# EAGLE board TopSolarPanel (EAGLE 6.6.0)
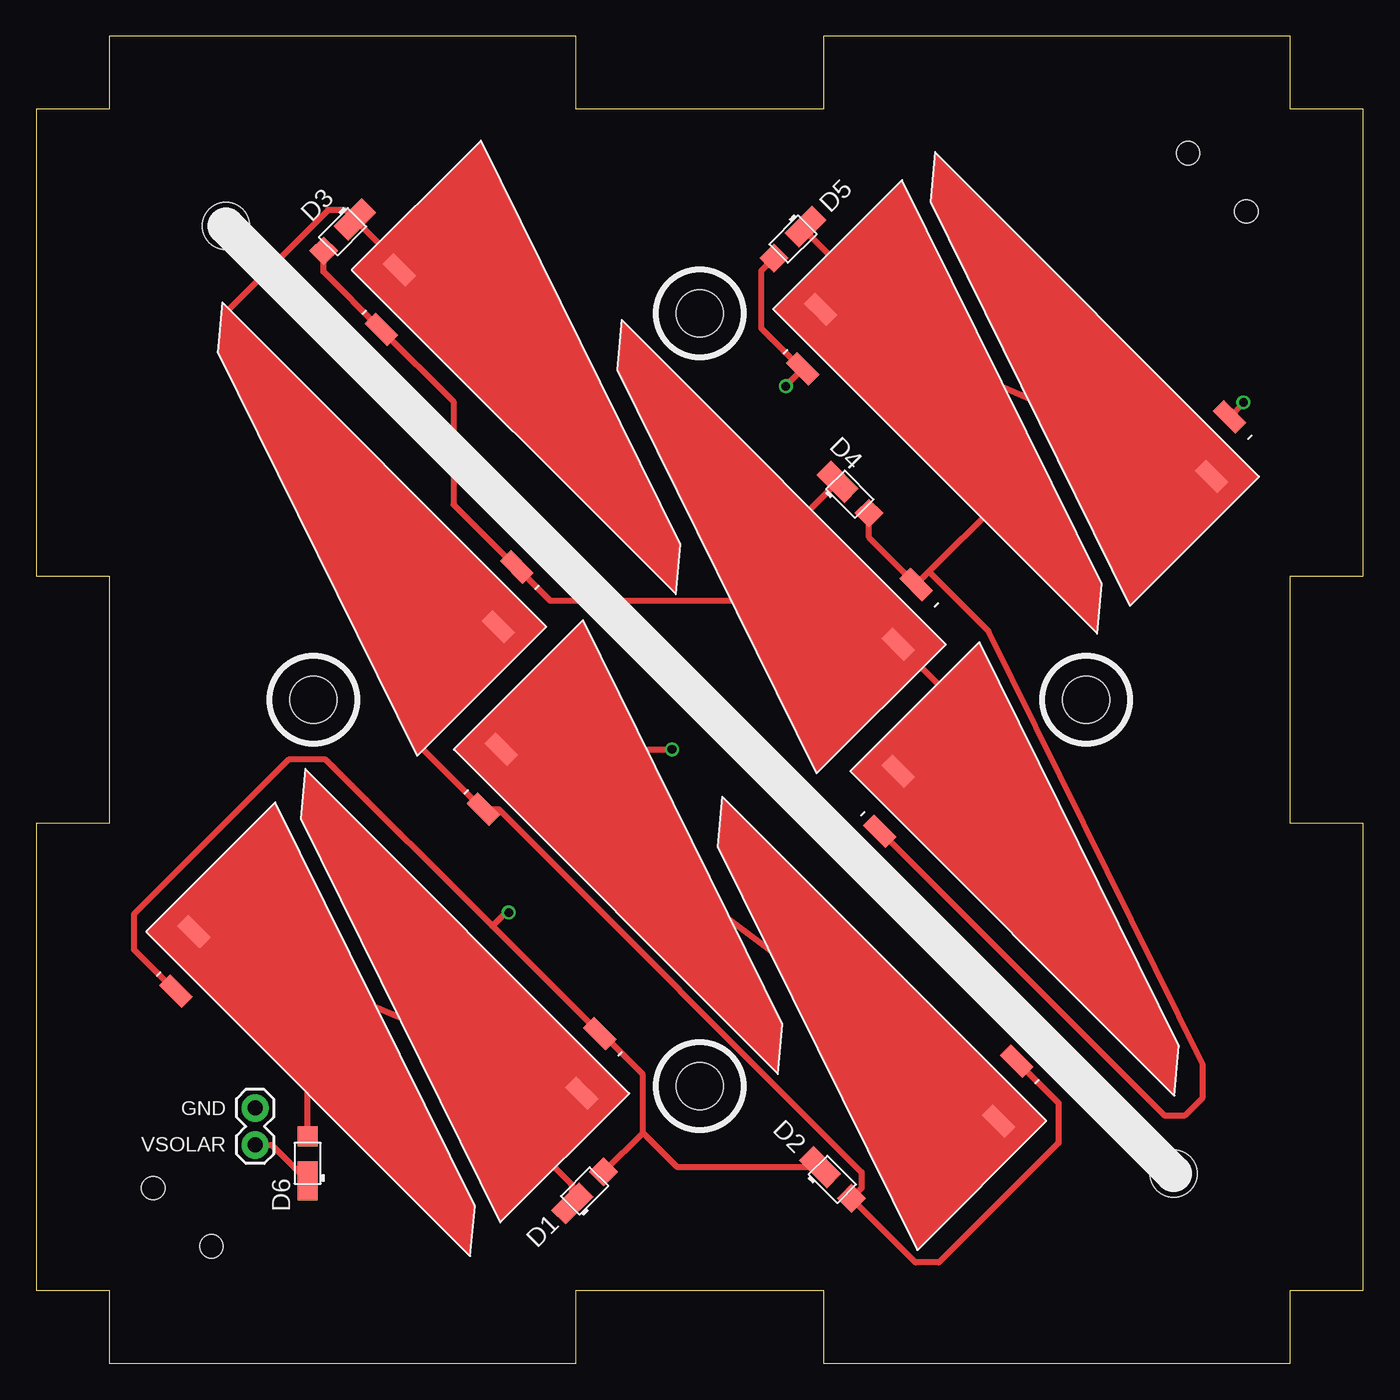
[diagram p0: board, top side]
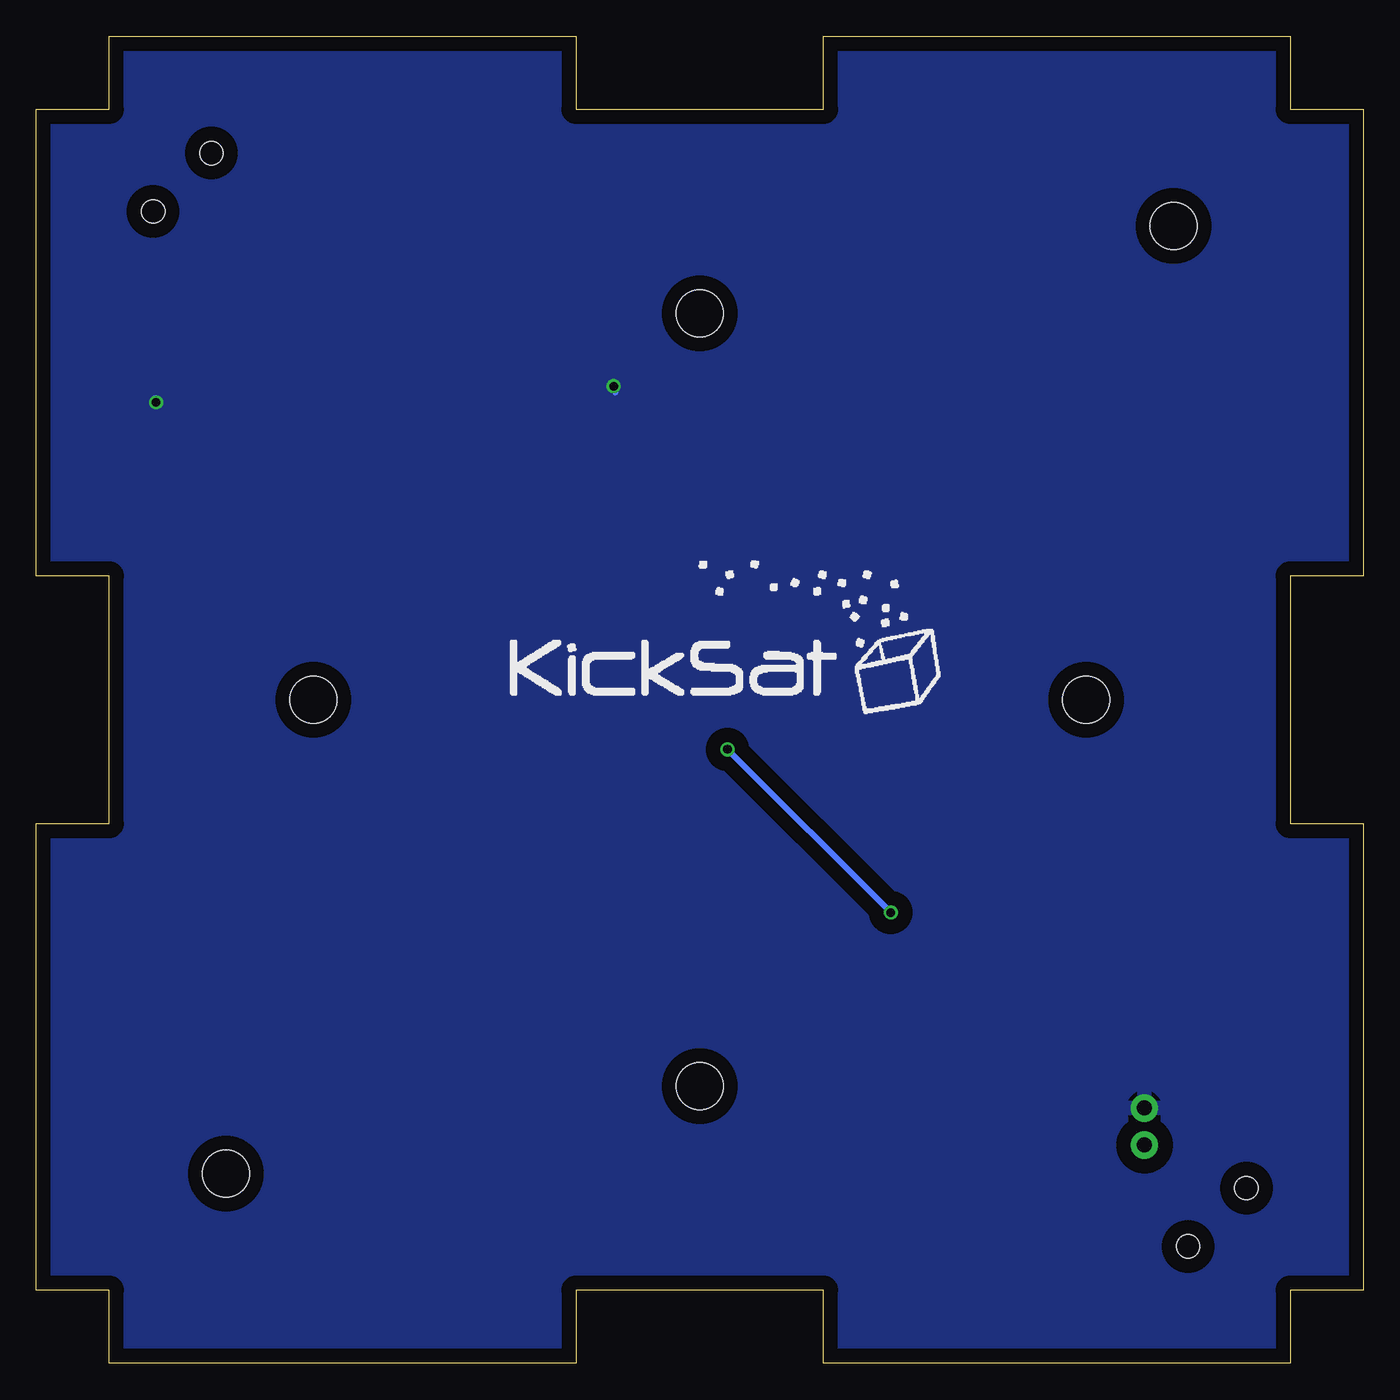
[diagram p1: board, bottom side, seen from below]

Size 91 x 91 mm. Coordinates in mm from the lower left corner, seen from the top.
Outline: 5,91 5,86 0,86 0,54 5,54 5,37 0,37 0,5 5,5 5,0 37,0 37,5 54,5 54,0 86,0 86,5 91,5 91,37 86,37 86,54 91,54 91,86 86,86 86,91 54,91 54,86 37,86 37,91 5,91
Copper layers (1*16): Top 0.0356mm / dielectric 1.5011mm / Bottom 0.0356mm
Design rules "OSHPark-2layer": minimum track width 6mil, minimum drill 13mil, track to track 6mil, track to pad 6mil, pad to pad 6mil, via to via 6mil, smd to smd 6mil, copper to edge 15mil, drill to drill 6mil, minimum pad ring 7mil, minimum via ring 7mil, stop-mask expansion 4mil, vias tented up to drill 0mil, thermal gap 10mil
Holes 3.2 mm at 45.5,72 45.5,19 72,45.5 19,45.5 78,13 13,78
Holes 1.6 mm at 8,12 12,8 79,83 83,79

## Footprints (pad centres in the part's own frame; a part is rotated, then mirrored left to right if it is on the bottom)
SB_DIODE = smd 2.7 x 1.4: NEG -1.2,0 | smd 1.4 x 1.4: POS 1.85,0
1X02 = drill 1.016 pad 1.88: 1 0,0; 2 2.54,0
SOLAR_CELL = smd 1.067 x 2.184: 1 -1.589,2.999; 2 2.187,5.011

## Placement (x,y rotation side)
D1  SB_DIODE  [SB_DIODE]  37.6,11.8 45 top
D2  SB_DIODE  [SB_DIODE]  54.6,12.6 315 top
D3  SB_DIODE  [SB_DIODE]  21,77.6 225 top
D4  SB_DIODE  [SB_DIODE]  55.8,59.6 315 top
D5  SB_DIODE  [SB_DIODE]  51.9,77.1 225 top
D6  SB_DIODE  [SB_DIODE]  18.6,13.7 90 top
FRAME1  FRAME-LETTER  [CREATIVE_COMMONS]  25,-8.1 0 top  (outside the outline)
JP5  M02PTH  [1X02]  15,17.5 270 top
SL1  SOLAR_CELL  [SOLAR_CELL]  35.4,23.6 225 top
SL2  SOLAR_CELL  [SOLAR_CELL]  12.8,24.5 45 top
SL3  SOLAR_CELL  [SOLAR_CELL]  64,21.7 225 top
SL4  SOLAR_CELL  [SOLAR_CELL]  33.9,37 45 top
SL5  SOLAR_CELL  [SOLAR_CELL]  29.7,55.6 225 top
SL6  SOLAR_CELL  [SOLAR_CELL]  26.9,69.9 45 top
SL7  SOLAR_CELL  [SOLAR_CELL]  57.1,54.4 225 top
SL8  SOLAR_CELL  [SOLAR_CELL]  61.1,35.5 45 top
SL9  SOLAR_CELL  [SOLAR_CELL]  55.8,67.2 45 top
SL10  SOLAR_CELL  [SOLAR_CELL]  78.6,65.9 225 top
U$1  KICKSAT_LOGO  [KICKSAT_LOGO]  59,44.3 0 bottom

## Library data of the parts
D1-D6 SL1-SL10 = Solar
FRAME1 = SparkFun-Aesthetics
JP5 = SparkFun-Connectors
U$1 = KickSat-Logo

## Nets
GND: D5.POS JP5.1 SL9.1 SL10.1
N$9: D1.NEG D6.POS SL1.2 SL2.2
N$37: D2.POS D3.NEG SL3.1 SL4.1 SL5.2 SL6.2
N$39: D3.POS D4.NEG SL5.1 SL6.1 SL7.2 SL8.2
N$45: D1.POS D2.NEG SL1.1 SL2.1 SL3.2 SL4.2
N$50: D4.POS D5.NEG SL7.1 SL8.1 SL9.2 SL10.2
VSOLAR: D6.NEG JP5.2

## Tracks (layer width: path | path; a pad name or v marks a point on that pad's centre or on a via)
GND  (via drill 0.6)
  Top 0.406: v51.4,67 51.4,67.04 SL9.1 52.5,68.2 49.7,71 49.7,74.9 D5.POS | SL10.1 82.8,65.86 v82.8,65.9
  Bottom 0.406: v51.4,67 51.3,66.9 51.3,66.6 | v82.8,65.9 82.8,66.2
  pour Bottom (isolate 1): 5,91 37,91 37,86 54,86 54,91 86,91 86,86 91,86 91,54 86,54 86,37 91,37 91,5 86,5 86,0 54,0 54,5 37,5 37,0 5,0 5,5 0,5 0,37 5,37 5,54 0,54 0,86 5,86
N$9
  Top 0.406: SL1.2 25.53,23.45 | 25.53,23.45 19.68,25.89 | 19.68,25.89 19.43,26 SL2.2 | D1.NEG 36.75,12.23 25.53,23.45 | D6.POS 18.6,24.81 19.68,25.89
N$37
  Top 0.406: SL3.1 70.1,17.85 70.1,15.1 61.9,6.9 60.3,6.9 D2.POS | D2.POS | D2.POS 56.61,11.99 56.61,13.09 31.7,38 SL4.1 30.6,38 25.9,42.7 25.9,44.71 SL5.2 13.4,68.81 13.4,71.5 13,71.9 13,72.1 20,79.1 21.2,79.1 D3.NEG 24.2,76.09 SL6.2
N$39
  Top 0.406: 52.6,52.3 35.25,52.3 SL5.1 32.9,54.6 28.6,58.9 28.6,65.95 SL6.1 19.69,74.86 D3.POS | 52.6,52.3 56.1,52.3 58.8,49.6 SL7.2 63,45.41 63,44.7 59.2,40.9 SL8.2 | D4.NEG 52.6,58.1 52.6,52.3
N$45  (via drill 0.6)
  Top 0.406: D1.POS 41.6,15.8 | 41.6,15.8 41.6,19.8 38.8,22.6 SL1.1 31.27,29.97 | SL2.1 6.7,28.35 6.7,30.8 17.3,41.4 19.85,41.4 31.27,29.97 | SL3.2 SL4.2 v43.59,42.09 v43.6,42.1 | 41.6,15.8 43.95,13.45 D2.NEG | v32.4,30.9 32.2,30.9 31.27,29.97
  Bottom 0.406: v43.6,42.1 v32.4,30.9
N$50
  Top 0.406: 65.91,67.1 SL9.2 55.01,73.5 56.9,73.5 52.75,77.65 D5.NEG | 65.91,67.1 SL10.2 | 61.22,54.28 SL7.1 57.11,56.64 D4.POS | 61.22,54.28 65.91,58.97 65.91,67.1 | SL8.1 77.35,17 78.8,17 80,18.2 80,20.5 65.3,50.2 61.22,54.28
VSOLAR
  Top 0.406: JP5.2 16.14,14.96 D6.NEG

## Text on the board
tPlace: VSOLAR
tNames: GND